# EAGLE board led_svitilna_16pcs (EAGLE 6.5.0)
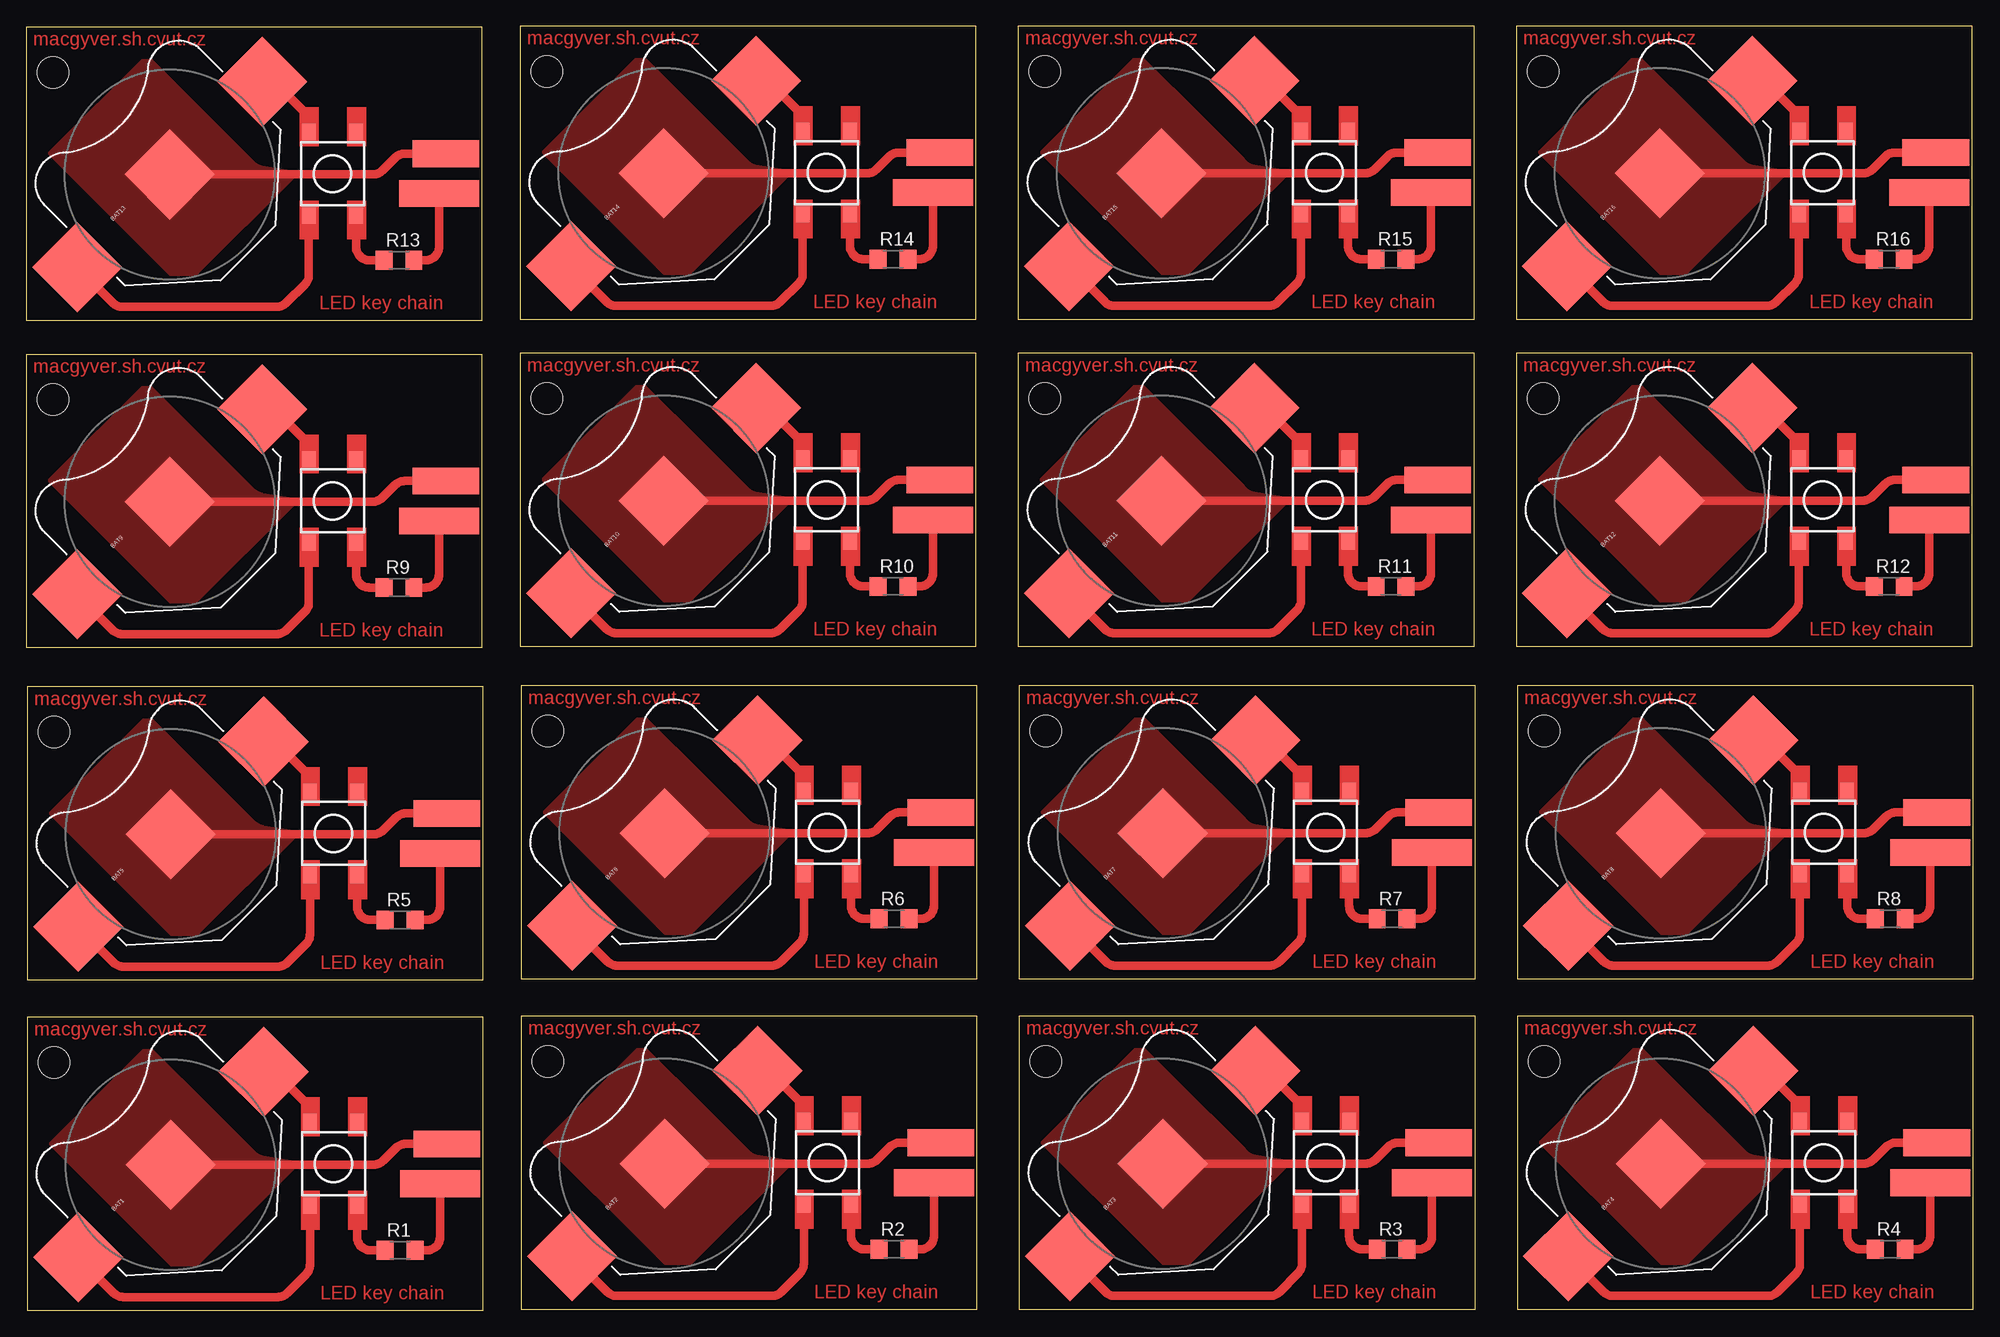
[diagram p0: board, top side]

Size 185.69 x 122.43 mm. Coordinates in mm from the lower left corner, seen from the top.
Outline: 0.1,0 43.59,0 43.59,27.93 0.1,27.93 0.1,0
Outline: 47.2,0.1 90.68,0.1 90.68,28.03 47.2,28.03 47.2,0.1
Outline: 94.7,0.1 138.19,0.1 138.19,28.03 94.7,28.03 94.7,0.1
Outline: 142.2,0.1 185.69,0.1 185.69,28.03 142.2,28.03 142.2,0.1
Outline: 0.1,31.5 43.59,31.5 43.59,59.43 0.1,59.43 0.1,31.5
Outline: 47.2,31.6 90.68,31.6 90.68,59.53 47.2,59.53 47.2,31.6
Outline: 94.7,31.6 138.19,31.6 138.19,59.53 94.7,59.53 94.7,31.6
Outline: 142.2,31.6 185.69,31.6 185.69,59.53 142.2,59.53 142.2,31.6
Outline: 0,63.2 43.48,63.2 43.48,91.13 0,91.13 0,63.2
Outline: 47.1,63.3 90.58,63.3 90.58,91.23 47.1,91.23 47.1,63.3
Outline: 94.6,63.3 138.09,63.3 138.09,91.23 94.6,91.23 94.6,63.3
Outline: 142.1,63.3 185.59,63.3 185.59,91.23 142.1,91.23 142.1,63.3
Outline: 0,94.4 43.48,94.4 43.48,122.33 0,122.33 0,94.4
Outline: 47.1,94.5 90.58,94.5 90.58,122.43 47.1,122.43 47.1,94.5
Outline: 94.6,94.5 138.09,94.5 138.09,122.43 94.6,122.43 94.6,94.5
Outline: 142.1,94.5 185.59,94.5 185.59,122.43 142.1,122.43 142.1,94.5
Copper layers (1*16): Top 0.035mm / dielectric 1.5mm / Bottom 0.035mm
Design rules "default": minimum track width 10mil, minimum drill 24mil, track to track 8mil, track to pad 8mil, pad to pad 8mil, via to via 8mil, smd to smd 8mil, copper to edge 40mil, drill to drill 8mil, minimum pad ring 10mil, minimum via ring 8mil, stop-mask expansion 4mil, vias tented up to drill 0mil, thermal gap 10mil
Holes 3 mm at 2.64,23.62 49.74,23.72 97.24,23.72 144.74,23.72 2.64,55.12 49.74,55.22 97.24,55.22 144.74,55.22 2.54,86.82 49.64,86.92 97.14,86.92 144.64,86.92 2.54,118.02 49.64,118.12 97.14,118.12 144.64,118.12
tRestrict: area -5.5,0.3 to 30.3,30.2; area 0.6,16.5 to 11.1,27.5; area 41.6,0.4 to 77.4,30.3; area 47.7,16.6 to 58.2,27.6; area 89.1,0.4 to 124.9,30.3; area 95.2,16.6 to 105.7,27.6; area 136.6,0.4 to 172.4,30.3; area 142.7,16.6 to 153.2,27.6; area -5.5,31.8 to 30.3,61.7; area 0.6,48 to 11.1,59; area 41.6,31.9 to 77.4,61.8; area 47.7,48.1 to 58.2,59.1; area 89.1,31.9 to 124.9,61.8; area 95.2,48.1 to 105.7,59.1; area 136.6,31.9 to 172.4,61.8; area 142.7,48.1 to 153.2,59.1; area -5.6,63.5 to 30.2,93.4; area 0.5,79.7 to 11,90.7; area 41.5,63.6 to 77.3,93.5; area 47.6,79.8 to 58.1,90.8; area 89,63.6 to 124.8,93.5; area 95.1,79.8 to 105.6,90.8; area 136.5,63.6 to 172.3,93.5; area 142.6,79.8 to 153.1,90.8; area -5.6,94.7 to 30.2,124.6; area 0.5,110.9 to 11,121.9; area 41.5,94.8 to 77.3,124.7; area 47.6,111 to 58.1,122; area 89,94.8 to 124.8,124.7; area 95.1,111 to 105.6,122; area 136.5,94.8 to 172.3,124.7; area 142.6,111 to 153.1,122

## Footprints (pad centres in the part's own frame; a part is rotated, then mirrored left to right if it is on the bottom)
BATTCON_20MM = smd 6.07 x 6.07: 1 -12.5,0; 2 0,0; 3 12.5,0
R1206 = smd 1.6 x 1.803: 1 -1.422,0; 2 1.422,0
TACTILE_SWITCH_TALL = smd 1.55 x 1.3: A1 -3.975,-2.25; A2 3.975,-2.25; B1 -3.975,2.25; B2 3.975,2.25
SMD-LED = smd 7.62 x 2.54: A -3.81,-1.905 | smd 6.35 x 2.54: K -3.175,1.905

## Placement (x,y rotation side)
BAT1  [BATTCON_20MM]  13.78,13.89 45 top
BAT2  [BATTCON_20MM]  60.88,13.99 45 top
BAT3  [BATTCON_20MM]  108.38,13.99 45 top
BAT4  [BATTCON_20MM]  155.88,13.99 45 top
BAT5  [BATTCON_20MM]  13.78,45.39 45 top
BAT6  [BATTCON_20MM]  60.88,45.49 45 top
BAT7  [BATTCON_20MM]  108.38,45.49 45 top
BAT8  [BATTCON_20MM]  155.88,45.49 45 top
BAT9  [BATTCON_20MM]  13.68,77.09 45 top
BAT10  [BATTCON_20MM]  60.78,77.19 45 top
BAT11  [BATTCON_20MM]  108.28,77.19 45 top
BAT12  [BATTCON_20MM]  155.78,77.19 45 top
BAT13  [BATTCON_20MM]  13.68,108.29 45 top
BAT14  [BATTCON_20MM]  60.78,108.39 45 top
BAT15  [BATTCON_20MM]  108.28,108.39 45 top
BAT16  [BATTCON_20MM]  155.78,108.39 45 top
R1  [R1206]  35.66,5.71 0 top
R2  [R1206]  82.76,5.81 0 top
R3  [R1206]  130.26,5.81 0 top
R4  [R1206]  177.76,5.81 0 top
R5  [R1206]  35.66,37.22 0 top
R6  [R1206]  82.76,37.32 0 top
R7  [R1206]  130.26,37.32 0 top
R8  [R1206]  177.76,37.32 0 top
R9  [R1206]  35.56,68.91 0 top
R10  [R1206]  82.66,69.02 0 top
R11  [R1206]  130.16,69.02 0 top
R12  [R1206]  177.66,69.02 0 top
R13  [R1206]  35.56,100.11 0 top
R14  [R1206]  82.66,100.21 0 top
R15  [R1206]  130.16,100.21 0 top
R16  [R1206]  177.66,100.21 0 top
S1  BTN  [TACTILE_SWITCH_TALL]  29.31,13.97 270 top
S2  BTN  [TACTILE_SWITCH_TALL]  76.41,14.07 270 top
S3  BTN  [TACTILE_SWITCH_TALL]  123.91,14.07 270 top
S4  BTN  [TACTILE_SWITCH_TALL]  171.41,14.07 270 top
S5  BTN  [TACTILE_SWITCH_TALL]  29.31,45.47 270 top
S6  BTN  [TACTILE_SWITCH_TALL]  76.41,45.57 270 top
S7  BTN  [TACTILE_SWITCH_TALL]  123.91,45.57 270 top
S8  BTN  [TACTILE_SWITCH_TALL]  171.41,45.57 270 top
S9  BTN  [TACTILE_SWITCH_TALL]  29.21,77.17 270 top
S10  BTN  [TACTILE_SWITCH_TALL]  76.31,77.27 270 top
S11  BTN  [TACTILE_SWITCH_TALL]  123.81,77.27 270 top
S12  BTN  [TACTILE_SWITCH_TALL]  171.31,77.27 270 top
S13  BTN  [TACTILE_SWITCH_TALL]  29.21,108.37 270 top
S14  BTN  [TACTILE_SWITCH_TALL]  76.31,108.47 270 top
S15  BTN  [TACTILE_SWITCH_TALL]  123.81,108.47 270 top
S16  BTN  [TACTILE_SWITCH_TALL]  171.31,108.47 270 top
U$1  SMD-LED  [SMD-LED]  43.28,13.97 0 top
U$2  SMD-LED  [SMD-LED]  90.38,14.07 0 top
U$3  SMD-LED  [SMD-LED]  137.88,14.07 0 top
U$4  SMD-LED  [SMD-LED]  185.38,14.07 0 top
U$5  SMD-LED  [SMD-LED]  43.28,45.47 0 top
U$6  SMD-LED  [SMD-LED]  90.38,45.57 0 top
U$7  SMD-LED  [SMD-LED]  137.88,45.57 0 top
U$8  SMD-LED  [SMD-LED]  185.38,45.57 0 top
U$9  SMD-LED  [SMD-LED]  43.18,77.17 0 top
U$10  SMD-LED  [SMD-LED]  90.28,77.27 0 top
U$11  SMD-LED  [SMD-LED]  137.78,77.27 0 top
U$12  SMD-LED  [SMD-LED]  185.28,77.27 0 top
U$13  SMD-LED  [SMD-LED]  43.18,108.37 0 top
U$14  SMD-LED  [SMD-LED]  90.28,108.47 0 top
U$15  SMD-LED  [SMD-LED]  137.78,108.47 0 top
U$16  SMD-LED  [SMD-LED]  185.28,108.47 0 top

## Library data of the parts
BAT1-BAT16 = SparkFun-Electromechanical
R1-R16 = rcl
S1-S16 = SparkFun-Electromechanical; PROD_ID: SWCH-11966
U$1-U$16 = led

## Nets
GND: BAT1.2 U$1.K
GND1: BAT2.2 U$2.K
GND2: BAT3.2 U$3.K
GND3: BAT4.2 U$4.K
GND4: BAT5.2 U$5.K
GND5: BAT6.2 U$6.K
GND6: BAT7.2 U$7.K
GND7: BAT8.2 U$8.K
GND8: BAT9.2 U$9.K
GND9: BAT10.2 U$10.K
GND10: BAT11.2 U$11.K
GND11: BAT12.2 U$12.K
GND12: BAT13.2 U$13.K
GND13: BAT14.2 U$14.K
GND14: BAT15.2 U$15.K
GND15: BAT16.2 U$16.K
N$1: BAT1.1 S1.A2
N$2: R1.1 S1.B2
N$3: R1.2 U$1.A
N$6: BAT2.1 S2.A2
N$7: R2.1 S2.B2
N$8: R2.2 U$2.A
N$11: BAT3.1 S3.A2
N$12: R3.1 S3.B2
N$13: R3.2 U$3.A
N$16: BAT4.1 S4.A2
N$17: R4.1 S4.B2
N$18: R4.2 U$4.A
N$21: BAT5.1 S5.A2
N$22: R5.1 S5.B2
N$23: R5.2 U$5.A
N$26: BAT6.1 S6.A2
N$27: R6.1 S6.B2
N$28: R6.2 U$6.A
N$31: BAT7.1 S7.A2
N$32: R7.1 S7.B2
N$33: R7.2 U$7.A
N$36: BAT8.1 S8.A2
N$37: R8.1 S8.B2
N$38: R8.2 U$8.A
N$41: BAT9.1 S9.A2
N$42: R9.1 S9.B2
N$43: R9.2 U$9.A
N$46: BAT10.1 S10.A2
N$47: R10.1 S10.B2
N$48: R10.2 U$10.A
N$51: BAT11.1 S11.A2
N$52: R11.1 S11.B2
N$53: R11.2 U$11.A
N$56: BAT12.1 S12.A2
N$57: R12.1 S12.B2
N$58: R12.2 U$12.A
N$61: BAT13.1 S13.A2
N$62: R13.1 S13.B2
N$63: R13.2 U$13.A
N$66: BAT14.1 S14.A2
N$67: R14.1 S14.B2
N$68: R14.2 U$14.A
N$71: BAT15.1 S15.A2
N$72: R15.1 S15.B2
N$73: R15.2 U$15.A
N$76: BAT16.1 S16.A2
N$77: R16.1 S16.B2
N$78: R16.2 U$16.A

## Tracks (layer width: path | path; a pad name or v marks a point on that pad's centre or on a via)
GND
  Top 0.813: BAT1.2 33.15,13.89 arc45 34.05,14.26 35.29,15.5 arc-45 36.19,15.87 U$1.K
  pour Top (isolate 1.27, no thermals): -1.17,27.94 29.31,27.94 29.31,0 -1.17,0
GND1
  Top 0.813: BAT2.2 80.25,13.99 arc45 81.15,14.37 82.39,15.6 arc-45 83.29,15.97 U$2.K
  pour Top (isolate 1.27, no thermals): 45.93,28.04 76.41,28.04 76.41,0.1 45.93,0.1
GND2
  Top 0.813: BAT3.2 127.75,13.99 arc45 128.65,14.37 129.89,15.6 arc-45 130.79,15.97 U$3.K
  pour Top (isolate 1.27, no thermals): 93.43,28.04 123.91,28.04 123.91,0.1 93.43,0.1
GND3
  Top 0.813: BAT4.2 175.25,13.99 arc45 176.15,14.37 177.39,15.6 arc-45 178.29,15.97 U$4.K
  pour Top (isolate 1.27, no thermals): 140.93,28.04 171.41,28.04 171.41,0.1 140.93,0.1
GND4
  Top 0.813: BAT5.2 33.15,45.39 arc45 34.05,45.77 35.29,47 arc-45 36.19,47.38 U$5.K
  pour Top (isolate 1.27, no thermals): -1.17,59.44 29.31,59.44 29.31,31.5 -1.17,31.5
GND5
  Top 0.813: BAT6.2 80.25,45.49 arc45 81.15,45.87 82.39,47.1 arc-45 83.29,47.48 U$6.K
  pour Top (isolate 1.27, no thermals): 45.93,59.54 76.41,59.54 76.41,31.6 45.93,31.6
GND6
  Top 0.813: BAT7.2 127.75,45.49 arc45 128.65,45.87 129.89,47.1 arc-45 130.79,47.48 U$7.K
  pour Top (isolate 1.27, no thermals): 93.43,59.54 123.91,59.54 123.91,31.6 93.43,31.6
GND7
  Top 0.813: BAT8.2 175.25,45.49 arc45 176.15,45.87 177.39,47.1 arc-45 178.29,47.48 U$8.K
  pour Top (isolate 1.27, no thermals): 140.93,59.54 171.41,59.54 171.41,31.6 140.93,31.6
GND8
  Top 0.813: BAT9.2 33.05,77.09 arc45 33.95,77.46 35.19,78.7 arc-45 36.09,79.07 U$9.K
  pour Top (isolate 1.27, no thermals): -1.27,91.14 29.21,91.14 29.21,63.2 -1.27,63.2
GND9
  Top 0.813: BAT10.2 80.15,77.19 arc45 81.05,77.56 82.29,78.8 arc-45 83.19,79.17 U$10.K
  pour Top (isolate 1.27, no thermals): 45.83,91.24 76.31,91.24 76.31,63.3 45.83,63.3
GND10
  Top 0.813: BAT11.2 127.65,77.19 arc45 128.55,77.56 129.79,78.8 arc-45 130.69,79.17 U$11.K
  pour Top (isolate 1.27, no thermals): 93.33,91.24 123.81,91.24 123.81,63.3 93.33,63.3
GND11
  Top 0.813: BAT12.2 175.15,77.19 arc45 176.05,77.56 177.29,78.8 arc-45 178.19,79.17 U$12.K
  pour Top (isolate 1.27, no thermals): 140.83,91.24 171.31,91.24 171.31,63.3 140.83,63.3
GND12
  Top 0.813: BAT13.2 33.05,108.29 arc45 33.95,108.66 35.19,109.9 arc-45 36.09,110.27 U$13.K
  pour Top (isolate 1.27, no thermals): -1.27,122.34 29.21,122.34 29.21,94.4 -1.27,94.4
GND13
  Top 0.813: BAT14.2 80.15,108.39 arc45 81.05,108.77 82.29,110 arc-45 83.19,110.38 U$14.K
  pour Top (isolate 1.27, no thermals): 45.83,122.44 76.31,122.44 76.31,94.5 45.83,94.5
GND14
  Top 0.813: BAT15.2 127.65,108.39 arc45 128.55,108.77 129.79,110 arc-45 130.69,110.38 U$15.K
  pour Top (isolate 1.27, no thermals): 93.33,122.44 123.81,122.44 123.81,94.5 93.33,94.5
GND15
  Top 0.813: BAT16.2 175.15,108.39 arc45 176.05,108.77 177.29,110 arc-45 178.19,110.38 U$16.K
  pour Top (isolate 1.27, no thermals): 140.83,122.44 171.31,122.44 171.31,94.5 140.83,94.5
N$1
  Top 0.813: S1.A2 27.06,4.34 arc-45 26.69,3.44 24.89,1.64 arc-45 23.99,1.27 9.26,1.27 arc-45 8.36,1.64 BAT1.1
N$2
  Top 0.813: S1.B2 31.56,6.99 arc90 32.83,5.71 R1.1
N$3
  Top 0.813: R1.2 38.2,5.71 arc90 39.47,6.99 U$1.A
N$4  (via drill 0.6)
  other vias: 2.64,23.62
N$5
  Top 0.813: 22.96,23.5 27.41,19.05
N$6
  Top 0.813: S2.A2 74.16,4.44 arc-45 73.79,3.54 71.99,1.74 arc-45 71.09,1.37 56.36,1.37 arc-45 55.46,1.74 BAT2.1
N$7
  Top 0.813: S2.B2 78.66,7.08 arc90 79.93,5.81 R2.1
N$8
  Top 0.813: R2.2 85.3,5.81 arc90 86.57,7.08 U$2.A
N$9
  Top 0.813: 70.06,23.59 74.5,19.15
N$10  (via drill 0.6)
  other vias: 49.74,23.72
N$11
  Top 0.813: S3.A2 121.66,4.44 arc-45 121.29,3.54 119.49,1.74 arc-45 118.59,1.37 103.86,1.37 arc-45 102.96,1.74 BAT3.1
N$12
  Top 0.813: S3.B2 126.16,7.08 arc90 127.43,5.81 R3.1
N$13
  Top 0.813: R3.2 132.8,5.81 arc90 134.07,7.08 U$3.A
N$14
  Top 0.813: 117.56,23.59 122,19.15
N$15  (via drill 0.6)
  other vias: 97.24,23.72
N$16
  Top 0.813: S4.A2 169.16,4.44 arc-45 168.79,3.54 166.99,1.74 arc-45 166.09,1.37 151.36,1.37 arc-45 150.46,1.74 BAT4.1
N$17
  Top 0.813: S4.B2 173.66,7.08 arc90 174.93,5.81 R4.1
N$18
  Top 0.813: R4.2 180.3,5.81 arc90 181.57,7.08 U$4.A
N$19
  Top 0.813: 165.06,23.59 169.5,19.15
N$20  (via drill 0.6)
  other vias: 144.74,23.72
N$21
  Top 0.813: S5.A2 27.06,35.84 arc-45 26.69,34.94 24.89,33.14 arc-45 23.99,32.77 9.26,32.77 arc-45 8.36,33.14 BAT5.1
N$22
  Top 0.813: S5.B2 31.56,38.48 arc90 32.83,37.22 R5.1
N$23
  Top 0.813: R5.2 38.2,37.22 arc90 39.47,38.48 U$5.A
N$24
  Top 0.813: 22.96,54.99 27.41,50.55
N$25  (via drill 0.6)
  other vias: 2.64,55.12
N$26
  Top 0.813: S6.A2 74.16,35.94 arc-45 73.79,35.04 71.99,33.24 arc-45 71.09,32.87 56.36,32.87 arc-45 55.46,33.24 BAT6.1
N$27
  Top 0.813: S6.B2 78.66,38.59 arc90 79.93,37.32 R6.1
N$28
  Top 0.813: R6.2 85.3,37.32 arc90 86.57,38.59 U$6.A
N$29
  Top 0.813: 70.06,55.1 74.5,50.65
N$30  (via drill 0.6)
  other vias: 49.74,55.22
N$31
  Top 0.813: S7.A2 121.66,35.94 arc-45 121.29,35.04 119.49,33.24 arc-45 118.59,32.87 103.86,32.87 arc-45 102.96,33.24 BAT7.1
N$32
  Top 0.813: S7.B2 126.16,38.59 arc90 127.43,37.32 R7.1
N$33
  Top 0.813: R7.2 132.8,37.32 arc90 134.07,38.59 U$7.A
N$34
  Top 0.813: 117.56,55.1 122,50.65
N$35  (via drill 0.6)
  other vias: 97.24,55.22
N$36
  Top 0.813: S8.A2 169.16,35.94 arc-45 168.79,35.04 166.99,33.24 arc-45 166.09,32.87 151.36,32.87 arc-45 150.46,33.24 BAT8.1
N$37
  Top 0.813: S8.B2 173.66,38.59 arc90 174.93,37.32 R8.1
N$38
  Top 0.813: R8.2 180.3,37.32 arc90 181.57,38.59 U$8.A
N$39
  Top 0.813: 165.06,55.1 169.5,50.65
N$40  (via drill 0.6)
  other vias: 144.74,55.22
N$41
  Top 0.813: S9.A2 26.96,67.54 arc-45 26.59,66.64 24.79,64.84 arc-45 23.89,64.47 9.16,64.47 arc-45 8.26,64.84 BAT9.1
N$42
  Top 0.813: S9.B2 31.46,70.18 arc90 32.73,68.91 R9.1
N$43
  Top 0.813: R9.2 38.1,68.91 arc90 39.37,70.18 U$9.A
N$44
  Top 0.813: 22.86,86.69 27.3,82.25
N$45  (via drill 0.6)
  other vias: 2.54,86.82
N$46
  Top 0.813: S10.A2 74.06,67.64 arc-45 73.69,66.74 71.89,64.94 arc-45 70.99,64.57 56.26,64.57 arc-45 55.36,64.94 BAT10.1
N$47
  Top 0.813: S10.B2 78.56,70.28 arc90 79.83,69.02 R10.1
N$48
  Top 0.813: R10.2 85.2,69.02 arc90 86.47,70.28 U$10.A
N$49
  Top 0.813: 69.96,86.79 74.41,82.35
N$50  (via drill 0.6)
  other vias: 49.64,86.92
N$51
  Top 0.813: S11.A2 121.56,67.64 arc-45 121.19,66.74 119.39,64.94 arc-45 118.49,64.57 103.76,64.57 arc-45 102.86,64.94 BAT11.1
N$52
  Top 0.813: S11.B2 126.06,70.28 arc90 127.33,69.02 R11.1
N$53
  Top 0.813: R11.2 132.7,69.02 arc90 133.97,70.28 U$11.A
N$54
  Top 0.813: 117.46,86.79 121.91,82.35
N$55  (via drill 0.6)
  other vias: 97.14,86.92
N$56
  Top 0.813: S12.A2 169.06,67.64 arc-45 168.69,66.74 166.89,64.94 arc-45 165.99,64.57 151.26,64.57 arc-45 150.36,64.94 BAT12.1
N$57
  Top 0.813: S12.B2 173.56,70.28 arc90 174.83,69.02 R12.1
N$58
  Top 0.813: R12.2 180.2,69.02 arc90 181.47,70.28 U$12.A
N$59
  Top 0.813: 164.96,86.79 169.41,82.35
N$60  (via drill 0.6)
  other vias: 144.64,86.92
N$61
  Top 0.813: S13.A2 26.96,98.74 arc-45 26.59,97.84 24.79,96.04 arc-45 23.89,95.67 9.16,95.67 arc-45 8.26,96.04 BAT13.1
N$62
  Top 0.813: S13.B2 31.46,101.38 arc90 32.73,100.11 R13.1
N$63
  Top 0.813: R13.2 38.1,100.11 arc90 39.37,101.38 U$13.A
N$64
  Top 0.813: 22.86,117.89 27.3,113.45
N$65  (via drill 0.6)
  other vias: 2.54,118.02
N$66
  Top 0.813: S14.A2 74.06,98.84 arc-45 73.69,97.94 71.89,96.14 arc-45 70.99,95.77 56.26,95.77 arc-45 55.36,96.14 BAT14.1
N$67
  Top 0.813: S14.B2 78.56,101.48 arc90 79.83,100.21 R14.1
N$68
  Top 0.813: R14.2 85.2,100.21 arc90 86.47,101.48 U$14.A
N$69
  Top 0.813: 69.96,118 74.41,113.55
N$70  (via drill 0.6)
  other vias: 49.64,118.12
N$71
  Top 0.813: S15.A2 121.56,98.84 arc-45 121.19,97.94 119.39,96.14 arc-45 118.49,95.77 103.76,95.77 arc-45 102.86,96.14 BAT15.1
N$72
  Top 0.813: S15.B2 126.06,101.48 arc90 127.33,100.21 R15.1
N$73
  Top 0.813: R15.2 132.7,100.21 arc90 133.97,101.48 U$15.A
N$74
  Top 0.813: 117.46,118 121.91,113.55
N$75  (via drill 0.6)
  other vias: 97.14,118.12
N$76
  Top 0.813: S16.A2 169.06,98.84 arc-45 168.69,97.94 166.89,96.14 arc-45 165.99,95.77 151.26,95.77 arc-45 150.36,96.14 BAT16.1
N$77
  Top 0.813: S16.B2 173.56,101.48 arc90 174.83,100.21 R16.1
N$78
  Top 0.813: R16.2 180.2,100.21 arc90 181.47,101.48 U$16.A
N$79
  Top 0.813: 164.96,118 169.41,113.55
N$80  (via drill 0.6)
  other vias: 144.64,118.12
(copper drawn outside any net)
  shapes: Top area x64

## Text on the board
Top: macgyver.sh.cvut.cz | macgyver.sh.cvut.cz | macgyver.sh.cvut.cz | macgyver.sh.cvut.cz | LED key chain | LED key chain | LED key chain | LED key chain | macgyver.sh.cvut.cz | macgyver.sh.cvut.cz | macgyver.sh.cvut.cz | macgyver.sh.cvut.cz | LED key chain | LED key chain | LED key chain | LED key chain | macgyver.sh.cvut.cz | macgyver.sh.cvut.cz | macgyver.sh.cvut.cz | macgyver.sh.cvut.cz | LED key chain | LED key chain | LED key chain | LED key chain | macgyver.sh.cvut.cz | macgyver.sh.cvut.cz | macgyver.sh.cvut.cz | macgyver.sh.cvut.cz | LED key chain | LED key chain | LED key chain | LED key chain